# Altium PCB iot-gateway.PcbDoc
Units mil, origin at the board's own origin, x right, y up, seen from the top; angles counter-clockwise.
Board outline 6000 x 4000 mil, 2 copper layers (Top Layer, Bottom Layer); 110 components, 103 nets, 392 pads, 16 vias.
Unrouted connection lines stored in the file: 217.
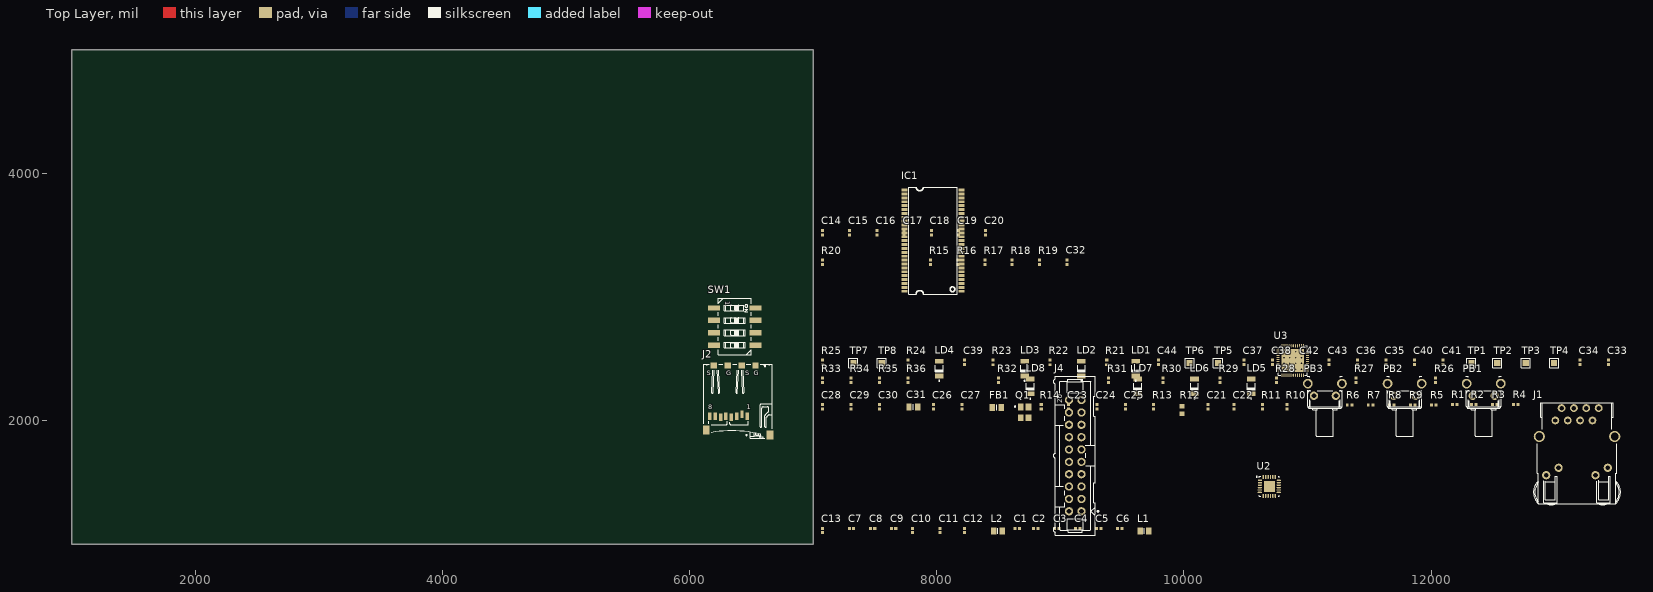
[diagram p0: Top Layer view]
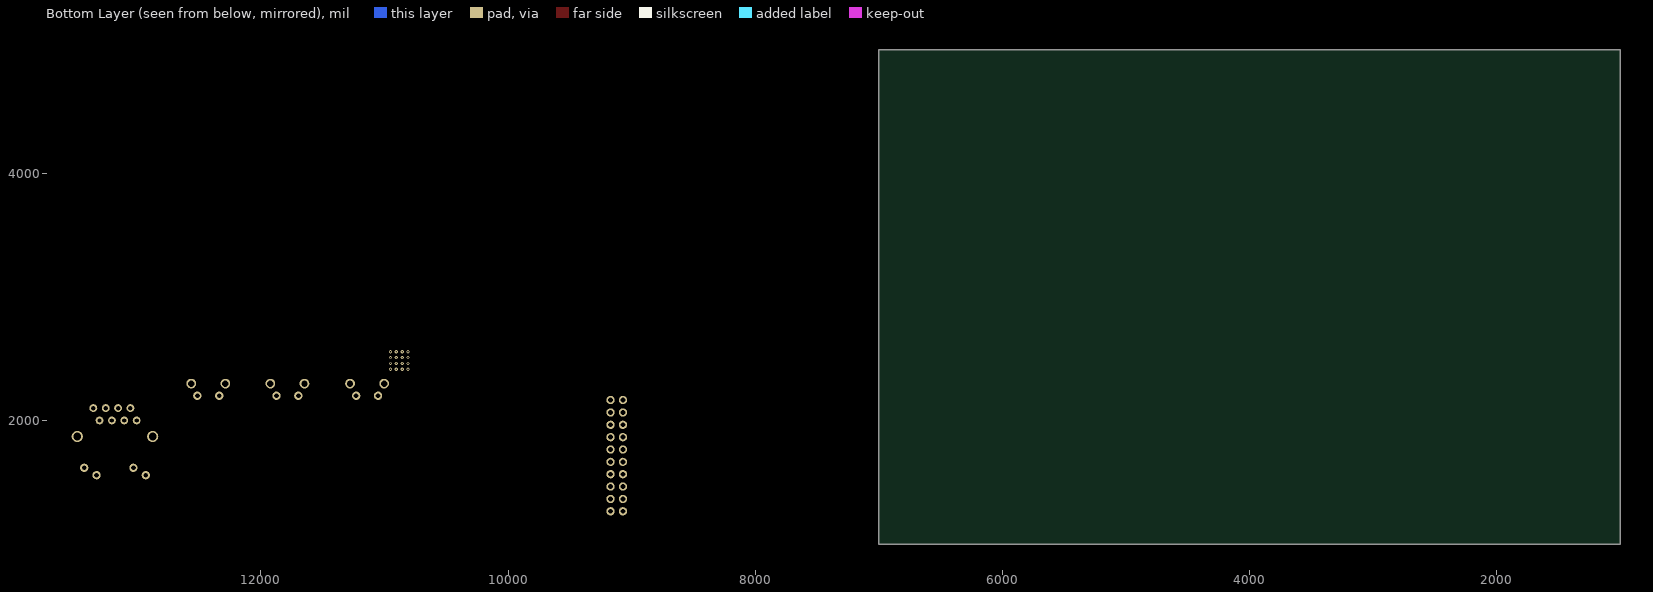
[diagram p1: Bottom Layer view, seen from below]

## Layer stack, top to bottom
Top Solder: solder mask 0.4, Solder Resist, Dk 3.5
Top Layer: signal copper 1.4
Dielectric 1: dielectric 12.6, FR-4, Dk 4.8
Bottom Layer: signal copper 1.4
Bottom Solder: solder mask 0.4, Solder Resist, Dk 3.5

## Board outline
1000,1000 7000,1000 7000,5000 1000,5000

## Design rules (kind name [scope] priority, off if disabled: settings)
Clearance [All] p1: gap=10 ignorepadtopadclearanceinfootprint=FALSE except(0: Arc-Hole Track-Hole SMDPad-Hole THPad-Hole Via-Hole Fill-Hole Poly-Hole Region-Hole Text-Hole)
DiffPairsRouting [All] p1: maxlimit=10 minlimit=10 mostfreqgap=10 toplayer_minwidth=15 toplayer_maxwidth=15 toplayer_prefwidth=15 bottomlayer_minwidth=15 bottomlayer_maxwidth=15 bottomlayer_prefwidth=15 maxuncoupledlength=500
PolygonConnect [All] p1: connectstyle=Relief reliefconductorwidth=10 reliefentries=4 polygonreliefangle="90 Angle" airgapwidth=10
RoomDefinition SDRAM [InComponentClass('SDRAM')] p1: confinementstyle=ConfineIn formatcopy=TRUE lockcomponents=FALSE outline 7045,3475 8560,3475 8560,3665 7045,3665
RoomDefinition PERIPH [InComponentClass('PERIPH')] p2: confinementstyle=ConfineIn formatcopy=TRUE lockcomponents=FALSE outline 7045,2670 9220,2670 9220,3425 7045,3425
RoomDefinition ISM [InComponentClass('ISM')] p3: confinementstyle=ConfineIn formatcopy=TRUE lockcomponents=FALSE outline 7045,2305 13600,2305 13600,2615 7045,2615
RoomDefinition ETHERNET [InComponentClass('ETHERNET')] p4: confinementstyle=ConfineIn formatcopy=TRUE lockcomponents=FALSE outline 7045,1305 13550,1305 13550,2255 7045,2255
RoomDefinition CPU [InComponentClass('CPU')] p5: confinementstyle=ConfineIn formatcopy=TRUE lockcomponents=FALSE outline 7045,1055 9755,1055 9755,1255 7045,1255
RoutingVias [All] p1: holewidth=28 width=50 viastyle="Through Hole" minholewidth=28 minwidth=50 maxholewidth=28 maxwidth=50
SolderMaskExpansion [All] p1: expansion=4
Width [All] p1: maxlimit=10 minlimit=10 preferedwidth=10
29 further rules are at their usual default settings.

## Classes and differential pairs
component class SDRAM: C14 C15 C16 C17 C18 C19 C20 IC1
component class CPU: C1 C2 C3 C4 C5 C6 C7 C8 C9 C10 C11 C12 C13 L1 L2 U1
component class ETHERNET: C21 C22 C23 C24 C25 C26 C27 C28 C29 C30 C31 FB1 J1 Q1 R1 R2 R3 R4 R5 R6 R7 R8 R9 R10 R11 R12 R13 R14 U2
component class ISM: C33 C34 C35 C36 C37 C38 C39 C40 C41 C42 C43 C44 C45 J3 L3 L4 L5 LD1 LD2 LD3 LD4 P1 R21 R22 R23 R24 R25 TP1 TP2 TP3 TP4 TP5 TP6 TP7 TP8 U3 X1 X2
component class PERIPH: C32 J2 J4 LD5 LD6 LD7 LD8 PB1 PB2 PB3 R15 R16 R17 R18 R19 R20 R26 R27 R28 R29 R30 R31 R32 R33 R34 R35 R36 SW1
differential pair RD: +RD_P -RD_N
differential pair TD: +TD_P -TD_N

## Components (designator, comment, footprint, x,y, rotation, side; value= is the part's Value field where it differs from the comment)
C1 "100nF" CAPC1005X55N 8650,1125 r0 top
C2 "100nF" CAPC1005X55N 8800,1125 r0 top
C3 "100nF" CAPC1005X55N 8970,1125 r0 top
C4 "100nF" CAPC1005X55N 9140,1125 r0 top
C5 "100nF" CAPC1005X55N 9310,1125 r0 top
C6 "100nF" CAPC1005X55N 9480,1125 r0 top
C7 "100nF" CAPC1005X55N 7310,1125 r0 top
C8 "100nF" CAPC1005X55N 7480,1125 r0 top
C9 "100nF" CAPC1005X55N 7650,1125 r0 top
C10 "100nF" CAPC1005X55N 7805,1110 r90 top
C11 "100nF" CAPC1005X55N 8025,1110 r90 top
C12 "100nF" CAPC1005X55N 8225,1110 r90 top
C13 "100nF" CAPC1005X55N 7075,1110 r90 top
C14 "100nF" CAPC1005X55N 7075,3520 r90 top
C15 "100nF" CAPC1005X55N 7295,3520 r90 top
C16 "100nF" CAPC1005X55N 7515,3520 r90 top
C17 "100nF" CAPC1005X55N 7735,3520 r90 top
C18 "100nF" CAPC1005X55N 7955,3520 r90 top
C19 "100nF" CAPC1005X55N 8175,3520 r90 top
C20 "100nF" CAPC1005X55N 8395,3520 r90 top
C21 "100nF" CAPC1005X55N 10195,2110 r90 top
C22 "100nF" CAPC1005X55N 10405,2110 r90 top
C23 "470pF" CAPC1005X55N 9065,2110 r90 top
C24 "1uF" CAPC1005X55N 9295,2110 r90 top
C25 "100nF" CAPC1005X55N 9525,2110 r90 top
C26 "18pF" CAPC1005X55N 7975,2110 r90 top
C27 "18pF" CAPC1005X55N 8205,2110 r90 top
C28 "100nF" CAPC1005X55N 7075,2110 r90 top
C29 "100nF" CAPC1005X55N 7305,2110 r90 top
C30 "100nF" CAPC1005X55N 7535,2110 r90 top
C31 "10uF" CAPC2012X135N 7810,2110 r0 top
C32 "100nF" CAPC1005X55N 9055,3280 r90 top
C33 "1uF" CAPC1005X55N 13435,2470 r90 top
C34 "4.7uF" CAPC1005X55N 13205,2470 r90 top
C35 "100nF" CAPC1005X55N 11635,2470 r90 top
C36 "100nF" CAPC1005X55N 11405,2470 r90 top
C37 "12pF" CAPC1005X55N 10485,2470 r90 top
C38 "12pF" CAPC1005X55N 10715,2470 r90 top
C39 "100nF" CAPC1005X55N 8225,2470 r90 top
C40 "12pF" CAPC1005X55N 11865,2470 r90 top
C41 "12pF" CAPC1005X55N 12095,2470 r90 top
C42 "100pF" CAPC1005X55N 10945,2470 r90 top
C43 "Undefined" CAPC1005X55N 11175,2470 r90 top
C44 "Undefined" CAPC1005X55N 9795,2470 r90 top
FB1 "220R@100MHz" INDC2012X105N 8485,2105 r0 top
IC1 "IS42S16" TSOP-54 7970,3455 r90 top
J1 "RJ45" TYCO_5-6605308-1 13180,2050 r0 top
J2 "microSD" ATTEND_112A-TAAR-R03 6315.04,2035 r0 top
J4 "Header 20" 3M_N2520-6002RB 9120,1715 r90 top
L1 "220R@100MHz" INDC2012X105N 9680,1105 r0 top
L2 "220R@100MHz" INDC2012X105N 8495,1105 r0 top
LD1 "Green" LED_OSRAM_LGN971 9610,2420 r90 top
LD2 "Green" LED_OSRAM_LGN971 9170,2420 r90 top
LD3 "Green" LED_OSRAM_LGN971 8710,2420 r90 top
LD4 "Green" LED_OSRAM_LGN971 8020,2420 r90 top
LD5 "Green" LED_OSRAM_LGN971 10545,2275 r90 top
LD6 "Green" LED_OSRAM_LGN971 10085,2275 r90 top
LD7 "Green" LED_OSRAM_LGN971 9625,2275 r90 top
LD8 "Green" LED_OSRAM_LGN971 8755,2275 r90 top
PB1 "Push Button" PB_TYCO_1-1825027-1 12425,2200 r90 top
PB2 "Push Button" PB_TYCO_1-1825027-1 11785,2200 r90 top
PB3 "Push Button" PB_TYCO_1-1825027-1 11140,2200 r90 top
Q1 "25MHz" XTAL_EPSON_TSX-3225 8710,2065 r0 top
R1 "49R9" RESC1005X35N 12190,2130 r0 top
R2 "49R9" RESC1005X35N 12345,2130 r0 top
R3 "49R9" RESC1005X35N 12515,2130 r0 top
R4 "49R9" RESC1005X35N 12685,2130 r0 top
R5 "1k5" RESC1005X40N 12020,2125 r0 top
R6 "4k7" RESC1005X40N 11340,2125 r0 top
R7 "4k7" RESC1005X40N 11510,2125 r0 top
R8 "4k7" RESC1005X40N 11680,2125 r0 top
R9 "4k7" RESC1005X40N 11850,2125 r0 top
R10 "33" RESC1005X40N 10835,2110 r90 top
R11 "33" RESC1005X40N 10635,2110 r90 top
R12 "21k" RESC1608X55N 9985,2085 r90 top
R13 "33" RESC1005X40N 9755,2110 r90 top
R14 "4k7" RESC1005X40N 8845,2110 r90 top
R15 "10k" RESC1005X40N 7950,3280 r90 top
R16 "10k" RESC1005X40N 8170,3280 r90 top
R17 "10k" RESC1005X40N 8390,3280 r90 top
R18 "10k" RESC1005X40N 8610,3280 r90 top
R19 "10k" RESC1005X40N 8830,3280 r90 top
R20 "10k" RESC1005X40N 7075,3280 r90 top
R21 "10k" RESC1005X40N 9375,2470 r90 top
R22 "10k" RESC1005X40N 8915,2470 r90 top
R23 "10k" RESC1005X40N 8455,2470 r90 top
R24 "10k" RESC1005X40N 7765,2470 r90 top
R25 "0" RESC1005X40N 7075,2470 r90 top
R26 "10k" RESC1005X40N 12035,2325 r90 top
R27 "10k" RESC1005X40N 11390,2325 r90 top
R28 "10k" RESC1005X40N 10750,2325 r90 top
R29 "10k" RESC1005X40N 10290,2325 r90 top
R30 "10k" RESC1005X40N 9830,2325 r90 top
R31 "10k" RESC1005X40N 9390,2325 r90 top
R32 "10k" RESC1005X40N 8500,2325 r90 top
R33 "10k" RESC1005X40N 7075,2325 r90 top
R34 "10k" RESC1005X40N 7305,2325 r90 top
R35 "10k" RESC1005X40N 7535,2325 r90 top
R36 "10k" RESC1005X40N 7765,2325 r90 top
SW1 "Switch" SW_CTS_219-4MST 6365,2760 r0 top
TP1 "Test Point" TPS127 12325,2465 r0 top
TP2 "Test Point" TPS127 12535,2465 r0 top
TP3 "Test Point" TPS127 12765,2465 r0 top
TP4 "Test Point" TPS127 12995,2465 r0 top
TP5 "Test Point" TPS127 10275,2465 r0 top
TP6 "Test Point" TPS127 10045,2465 r0 top
TP7 "Test Point" TPS127 7325,2465 r0 top
TP8 "Test Point" TPS127 7555,2465 r0 top
U2 "LAN8742A-CZ-TR" QFN50P400X400X80-25N-S225 10690.16,1466.77 r0 top
U3 "nRF52832-QFAA" QFN40P600X600X90-48N 10880,2485 r0 top

## Footprints (in the part's own frame and the unit in brackets; to place one, negate y for a bottom-side part, rotate by r counter-clockwise, add the part's x,y. Pads: shape width x height; smd on the part's side, far side on the other; paste and mask are expansions set on the pad)
3M_N2520-6002RB [mm] "20 Contacts - Straight .100\" x .100\" Low Profile Four-Wall Header"
  round 1.7 hole 1: 1(-11.43,-1.27) 2(-11.43,1.27) 3(-8.89,-1.27) 4(-8.89,1.27) 5(-6.35,-1.27) 6(-6.35,1.27) 7(-3.81,-1.27) 8(-3.81,1.27) 9(-1.27,-1.27) 10(-1.27,1.27) 11(1.27,-1.27) 12(1.27,1.27) 13(3.81,-1.27) 14(3.81,1.27) 15(6.35,-1.27) 16(6.35,1.27) 17(8.89,-1.27) 18(8.89,1.27) 19(11.43,-1.27) 20(11.43,1.27)
  silkscreen extent -16.36,-4.85 16.36,4.52, body extent -16.36,-4.11 16.36,4.52, height 9.91
ATTEND_112A-TAAR-R03 [mm] "MicroSD Socket, Push-Push Type"
  rect 0.7x1.5 smd: 1(3.85,0) 2(2.75,0.4) 3(1.65,0) 4(0.55,-0.2) 5(-0.55,0) 6(-1.65,-0.2) 7(-2.75,0) 8(-3.85,0)
  rect 1.4x1.9 smd: 9(-4.6,-2.85) 9(8.53,-3.85)
  rect 1.3x1.2 smd: 9(-0.17,10.4) 9(5.53,10.4) 10(-3.02,10.4) 10(2.68,10.4)
  silkscreen extent -5.07,-4.5 8.93,10.7, body extent -5.07,-4.5 8.94,10.7, height 1.83
CAPC1005X55N [mm] "Chip Capacitor, Body 1.0x0.55mm, IPC Medium Density"
  rect 0.62x0.62 smd: 1(-0.45,0) 2(0.45,0)
  body extent -0.52,-0.27 0.53,0.28, height 0.55
CAPC2012X135N [mm] "Chip Capacitor, Body 2.0x1.25mm, IPC Medium Density"
  rect 1.05x1.4 smd: 1(-0.9,0) 2(0.9,0)
  silkscreen extent 0,-0.58 0,0.58, body extent -1.05,-0.67 1.05,0.68, height 1.25
INDC2012X105N [mm] "Chip Inductor, EIA 0805, Metric 2012, Body 2.0x1.25mm, IPC Medium Density"
  rect 1.15x1.45 smd: 1(-0.9,0) 2(0.9,0)
  silkscreen extent 0,-0.6 0,0.6, body extent -1.1,-0.7 1.1,0.7, height 1.1
LED_OSRAM_LGN971 [mm] "Green Chip LED, 2-Leads, Body 3.2 x1.6mm, IPC Medium Density"
  rect 1x1.75 smd: 1(-1.5,0) 2(1.5,0)
  silkscreen extent -2.62,-0.8 0.65,0.8, body extent -1.65,-0.85 1.65,0.85, height 1.2
PB_TYCO_1-1825027-1 [mm] "Right Angle Micro Miniature Tactile Pushbutton Switche, Round Actuator Length = 5.74mm, FSMRAJ Serie"
  round 1.7 hole 1: 1(0,-2.25) 2(0,2.25)
  round 2 hole 1.3: 3(2.49,-3.505) 4(2.49,3.505)
  silkscreen extent -8.36,-3.56 4,3.56, body extent -8.36,-4.2 4,4.2, height 7.01
QFN40P600X600X90-48N [mm]
  oval 0.65x0.2 smd: 1(-3.025,2.2) 2(-3.025,1.8) 3(-3.025,1.4) 4(-3.025,1) 5(-3.025,0.6) 6(-3.025,0.2) 7(-3.025,-0.2) 8(-3.025,-0.6) 9(-3.025,-1) 10(-3.025,-1.4) 11(-3.025,-1.8) 12(-3.025,-2.2) 25(3.025,-2.2) 26(3.025,-1.8) 27(3.025,-1.4) 28(3.025,-1) 29(3.025,-0.6) 30(3.025,-0.2) 31(3.025,0.2) 32(3.025,0.6) 33(3.025,1) 34(3.025,1.4) 35(3.025,1.8) 36(3.025,2.2)
  oval 0.2x0.65 smd: 13(-2.2,-3.025) 14(-1.8,-3.025) 15(-1.4,-3.025) 16(-1,-3.025) 17(-0.6,-3.025) 18(-0.2,-3.025) 19(0.2,-3.025) 20(0.6,-3.025) 21(1,-3.025) 22(1.4,-3.025) 23(1.8,-3.025) 24(2.2,-3.025) 37(2.2,3.025) 38(1.8,3.025) 39(1.4,3.025) 40(1,3.025) 41(0.6,3.025) 42(0.2,3.025) 43(-0.2,3.025) 44(-0.6,3.025) 45(-1,3.025) 46(-1.4,3.025) 47(-1.8,3.025) 48(-2.2,3.025)
  rect 4.7x4.7 smd: 49(0,0)
  silkscreen extent -4.02,-3 3,3, body extent -3.02,-3.02 3.02,3.02, height 0.86
QFN50P400X400X80-25N-S225 [mm] "QFN,0.50mm pitch,square;6 pin X 6 pin,4mm X 4mm body (w/thermal tab 2.25 X 2.25 mm), IPC Medium Density"
  oval 0.85x0.3 smd: 1(-1.95,1.25) 2(-1.95,0.75) 3(-1.95,0.25) 4(-1.95,-0.25) 5(-1.95,-0.75) 6(-1.95,-1.25) 13(1.95,-1.25) 14(1.95,-0.75) 15(1.95,-0.25) 16(1.95,0.25) 17(1.95,0.75) 18(1.95,1.25)
  oval 0.3x0.85 smd: 7(-1.25,-1.95) 8(-0.75,-1.95) 9(-0.25,-1.95) 10(0.25,-1.95) 11(0.75,-1.95) 12(1.25,-1.95) 19(1.25,1.95) 20(0.75,1.95) 21(0.25,1.95) 22(-0.25,1.95) 23(-0.75,1.95) 24(-1.25,1.95)
  rect 2.25x2.25 smd: 25(0,0)
  silkscreen extent -2.72,-2.05 2.05,2.07, body extent -2.07,-2.07 2.08,2.08, height 0.8
RESC1005X35N [mm] "Chip Resistor, EIA 0402, Metric 1005, Body 1.0x0.5mm, IPC Medium Density"
  rect 0.58x0.62 smd: 1(-0.47,0) 2(0.47,0)
  body extent -0.52,-0.27 0.53,0.28, height 0.35
RESC1005X40N [mm] "Chip Resistor, EIA 0402, Metric 1005, Body 1.0x0.5mm, IPC Medium Density"
  rect 0.58x0.62 smd: 1(-0.47,0) 2(0.47,0)
  body extent -0.52,-0.27 0.53,0.28, height 0.4
RESC1608X55N [mm] "Chip Resistor, EIA 0603, Metric 1608, Body 1.6x0.8mm, IPC Medium Density"
  rect 0.9x1 smd: 1(-0.8,0) 2(0.8,0)
  body extent -0.87,-0.47 0.88,0.48, height 0.55
SW_CTS_219-4MST [mm] "Pitch 2.54mm, Body 6.7 x 11.63mm, 4 Ways SPST Surface-Mounting DIP Switch, CTS 219 Series"
  rect 2.44x1.13 smd: 1(-4.3,3.81) 2(-4.3,1.27) 3(-4.3,-1.27) 4(-4.3,-3.81) 5(4.3,-3.81) 6(4.3,-1.27) 7(4.3,1.27) 8(4.3,3.81)
  silkscreen extent -3.35,-5.82 3.35,5.82, body extent -4.95,-5.81 4.96,5.82, height 4.3
TPS127 [mil] "1.27 x  1.27mm SMD Test Point Area"
  rect 50x50 smd paste-50: 1(0,0)
  silkscreen extent -37,-37 37,37
TSOP-54 [mm]
  rect 0.6x1.2 smd: 1(-10.4,-5.85) 2(-9.6,-5.85) 3(-8.8,-5.85) 4(-8,-5.85) 5(-7.2,-5.85) 6(-6.4,-5.85) 7(-5.6,-5.85) 8(-4.8,-5.85) 9(-4,-5.85) 10(-3.2,-5.85) 11(-2.4,-5.85) 12(-1.6,-5.85) 13(-0.8,-5.85) 14(0,-5.85) 15(0.8,-5.85) 16(1.6,-5.85) 17(2.4,-5.85) 18(3.2,-5.85) 19(4,-5.85) 20(4.8,-5.85) 21(5.6,-5.85) 22(6.4,-5.85) 23(7.2,-5.85) 24(8,-5.85) 25(8.8,-5.85) 26(9.6,-5.85) 27(10.4,-5.85) 28(10.4,5.85) 29(9.6,5.85) 30(8.8,5.85) 31(8,5.85) 32(7.2,5.85) 33(6.4,5.85) 34(5.6,5.85) 35(4.8,5.85) 36(4,5.85) 37(3.2,5.85) 38(2.4,5.85) 39(1.6,5.85) 40(0.8,5.85) 41(0,5.85) 42(-0.8,5.85) 43(-1.6,5.85) 44(-2.4,5.85) 45(-3.2,5.85) 46(-4,5.85) 47(-4.8,5.85) 48(-5.6,5.85) 49(-6.4,5.85) 50(-7.2,5.85) 51(-8,5.85) 52(-8.8,5.85) 53(-9.6,5.85) 54(-10.4,5.85)
  silkscreen extent -11,-5 11,5
TYCO_5-6605308-1 [mm] "1 Port, Yellow/Green LEDs, RJ45 10/100Base-T Ethernet, Mag45 Connector Module With Integrated Magnetics"
  round 1.6 hole 0.9: 1(-4.445,-1.27) 2(-3.175,1.27) 3(-1.905,-1.27) 4(-0.635,1.27) 5(0.635,-1.27) 6(1.905,1.27) 7(3.175,-1.27) 8(4.445,1.27)
  round 2.3 hole 1.6: 9(-7.747,-4.572) 10(7.747,-4.572)
  round 1.7 hole 1: D1(-6.325,-12.522) D2(-3.785,-10.998) D3(6.325,-10.998) D4(3.785,-12.522)
  round 1 hole 3.2 unplated mask+1.1: M1(-5.715,-7.62) M2(5.715,-7.62)
  silkscreen extent -8.95,-18.59 8.95,2.41, body extent -8.95,-18.6 8.95,2.41, height 14.97
XTAL_EPSON_TSX-3225 [mm] "Crystal TSX-3225 Serie, Corner Concave; 4 pin, 2.50mm L X 3.2mm W X 0.6mm H"
  rect 1.15x1.4 smd: 1(-0.8,1.1) 2(-0.8,-1.1) 3(0.8,-1.1) 4(0.8,1.1)
  silkscreen extent -2.07,1.08 -1.83,1.32, body extent -1.25,-1.6 1.25,1.6, height 0.6

## Part data
C1 C2 C3 C4 C5 C6 C7 C8 C9 C10 C11 C12 C13 C14 C15 C16 C17 C18 C19 C20 C21 C22 C25 C28 C29 C30 C32 C35 C36 C39: library part CC0402_100NF_16V_10%_X5R, "Non-polarised capacitor", Case=0402, Manufacturer=GENERIC, Manufacturer1 ComponentHeight=0.55mm, Manufacturer1 Example=MURATA, Manufacturer1 Part Number=GRM155R61C104KA88D, Tolerance=±10%, Voltage=16V, Author="CERN DEM JLC", Component Type=Standard, CreateDate=2013-12-10, HelpURL=\\cern.ch\dfs\Applications\Altium\Datasheets\CC0402_X5R_MURATA_GRM.pdf, LatestRevisionDate=2013-12-10, Manufacturer Part Number=CC0402_100NF_16V_10%_X5R, Mounted=Yes, Part Description="SMD Multilayer Chip Ceramic Capacitor", Part Number=CC0402_100NF_16V_10%_X5R, Pin Count=2, Sense=No, SMD=Yes, Socket=No, Status=None, TC=X5R
C23: library part CC0402_470PF_50V_10%_X7R, "Non-polarised capacitor", Case=0402, Manufacturer=GENERIC, Manufacturer1 ComponentHeight=0.55mm, Manufacturer1 Example=PHYCOMP, Manufacturer1 Part Number=223858715618, Tolerance=±10%, Voltage=50V, Author="CERN DEM JLC", Component Type=Standard, CreateDate=2007-12-03, HelpURL=\\cern.ch\dfs\Applications\Altium\Datasheets\CC0402_NP0_PHYCOMP.pdf, LatestRevisionDate=2007-12-03, Manufacturer Part Number=CC0402_470PF_50V_10%_X7R, Mounted=Yes, Part Description="SMD Multilayer Chip Ceramic Capacitor", Part Number=CC0402_470PF_50V_10%_X7R, Pin Count=2, Sense=No, SMD=Yes, Socket=No, Status="Not Recommended", TC=X7R
C24 C33: library part CC0402_1UF_16V_10%_X5R, "Non-polarised capacitor", Case=0402, Manufacturer=GENERIC, Manufacturer1 ComponentHeight=0.55mm, Manufacturer1 Example=TDK, Manufacturer1 Part Number=C1005X5R1C105KT, Tolerance=±10%, Voltage=16V, Author="CERN DEM JLC", Component Type=Standard, CreateDate=2012-10-25, HelpURL=\\cern.ch\dfs\Applications\Altium\Datasheets\CC0402_X5R_TDK_C.pdf, LatestRevisionDate=2012-10-25, Manufacturer Part Number=CC0402_1UF_16V_10%_X5R, Mounted=Yes, Part Description="SMD Multilayer Chip Ceramic Capacitor", Part Number=CC0402_1UF_16V_10%_X5R, Pin Count=2, Sense=No, SMD=Yes, Socket=No, Status=Preferred, TC=X5R
C26 C27: library part CC0402_18PF_50V_5%_C0G, "Non-polarised capacitor", Case=0402, Manufacturer=GENERIC, Manufacturer1 ComponentHeight=0.55mm, Manufacturer1 Example=KEMET, Manufacturer1 Part Number=C0402C180J5GACTU, Tolerance=±5%, Voltage=50V, Author="CERN DEM JLC", Component Type=Standard, CreateDate=2016-10-04, HelpURL="\\cern.ch\dfs\Applications\Altium\Datasheets\CC0805_C0G_KEMET_(Commercial Grade).pdf", LatestRevisionDate=2016-10-04, Manufacturer Part Number=CC0402_18PF_50V_5%_C0G, Mounted=Yes, Part Description="SMD Multilayer Chip Ceramic Capacitor", Part Number=CC0402_18PF_50V_5%_C0G, Pin Count=2, Sense=No, SMD=Yes, Socket=No, Status=Preferred, TC=C0G/NP0
C31: library part CC0805_10UF_16V_10%_X5R, "Non-polarised capacitor", Case=0805, Manufacturer=GENERIC, Manufacturer1 ComponentHeight=1.4mm, Manufacturer1 Example=KEMET, Manufacturer1 Part Number=C0805C106K4PAC, Tolerance=±10%, Voltage=16V, Author="CERN DEM JLC", Component Type=Standard, CreateDate=2007-12-03, HelpURL=\\cern.ch\dfs\Applications\Altium\Datasheets\CC1206_X5R_KEMET.pdf, LatestRevisionDate=2007-12-03, Manufacturer Part Number=CC0805_10UF_16V_10%_X5R, Mounted=Yes, Part Description="SMD Multilayer Chip Ceramic Capacitor", Part Number=CC0805_10UF_16V_10%_X5R, Pin Count=2, Sense=No, SMD=Yes, Socket=No, Status=Preferred, TC=X5R
C34: library part CC0402_4.7UF_6.3V_20%_X5R, "Non-polarised capacitor", Case=0402, Manufacturer=GENERIC, Manufacturer1 ComponentHeight=0.65mm, Manufacturer1 Example=TDK, Manufacturer1 Part Number=C1005X5R0J475M050BC, Tolerance=±20%, Voltage=6.3V, Author="CERN DEM JLC", Component Type=Standard, CreateDate=2015-03-03, HelpURL=\\cern.ch\dfs\Applications\Altium\Datasheets\CC0402_X5R_TDK_C.pdf, LatestRevisionDate=2015-03-03, Manufacturer Part Number=CC0402_4.7UF_6.3V_20%_X5R, Mounted=Yes, Part Description="SMD Multilayer Chip Ceramic Capacitor", Part Number=CC0402_4.7UF_6.3V_20%_X5R, Pin Count=2, Sense=No, SMD=Yes, Socket=No, Status=Preferred, TC=X5R
C37 C38 C40 C41: library part CC0402_12PF_50V_5%_C0G, "Non-polarised capacitor", Case=0402, Manufacturer=GENERIC, Manufacturer1 ComponentHeight=0.55mm, Manufacturer1 Example=KEMET, Manufacturer1 Part Number=C0402C120J5GACTU, Tolerance=±5%, Voltage=50V, Author="CERN DEM JLC", Component Type=Standard, CreateDate=2016-10-04, HelpURL="\\cern.ch\dfs\Applications\Altium\Datasheets\CC0805_C0G_KEMET_(Commercial Grade).pdf", LatestRevisionDate=2016-10-04, Manufacturer Part Number=CC0402_12PF_50V_5%_C0G, Mounted=Yes, Part Description="SMD Multilayer Chip Ceramic Capacitor", Part Number=CC0402_12PF_50V_5%_C0G, Pin Count=2, Sense=No, SMD=Yes, Socket=No, Status=Preferred, TC=C0G/NP0
C42: library part CC0402_100PF_50V_5%_C0G, "Non-polarised capacitor", Case=0402, Manufacturer=GENERIC, Manufacturer1 ComponentHeight=0.55mm, Manufacturer1 Example=KEMET, Manufacturer1 Part Number=C0402C101J5GACTU, Tolerance=±5%, Voltage=50V, Author="CERN DEM JLC", Component Type=Standard, CreateDate=2007-12-03, HelpURL="\\cern.ch\dfs\Applications\Altium\Datasheets\CC0805_C0G_KEMET_(Commercial Grade).pdf", LatestRevisionDate=2015-04-22, Manufacturer Part Number=CC0402_100PF_50V_5%_C0G, Mounted=Yes, Part Description="SMD Multilayer Chip Ceramic Capacitor", Part Number=CC0402_100PF_50V_5%_C0G, Pin Count=2, Sense=No, SMD=Yes, Socket=No, Status=Preferred, TC=C0G/NP0
C43 C44: library part CC0402_NO-VALUE, "Non-polarised capacitor", Case=0402, Manufacturer1 ComponentHeight=0.55mm, Author="CERN DEM JLC", Component Type=Standard, CreateDate=2014-01-14, HelpURL=Undefined, LatestRevisionDate=2014-01-14, Manufacturer=Undefined, Manufacturer Part Number=CC0402_NO-VALUE, Mounted=No, Part Description="Reserved Footprint For 0402(1005) Chip Ceramic Capacitor", Part Number=CC0402_NO-VALUE, Pin Count=2, Sense=No, SMD=Yes, Socket=No, Status=None
FB1 L1 L2: library part IND0805_MURATA_BLM21PG221SN1D, "Inductor", Case=0805, Manufacturer=MURATA, Manufacturer Part Number=BLM21PG221SN1D, Power=2A, Resistance=0.05R, Tolerance=±25%, Author="CERN DEM JLC", ComponentHeight=1.05mm, Component Type=Standard, CreateDate=2010-01-25, HelpURL=\\cern.ch\dfs\Applications\Altium\Datasheets\IND0402_MURATA_BLM21P.pdf, LatestRevisionDate=2010-01-25, Mounted=Yes, Part Description="SMD EMIFIL Suppression Chip Ferrite Bead", Part Number=IND0805_MURATA_BLM21PG221SN1D, Pin Count=2, SMD=Yes, Socket=No, Status=None
  FB1: Table="Inductors SMD"
  L1 L2: Sense=No
IC1: "SDRAM 64m 200mhz 54tsop", Package="TSOP-54 ISSI", Availability=Unavailable, MF=ISSI, MP=IS42S16400J-5TL-TR, Price="1.24 USD"
J1: library part TYCO_5-6605308-1, "1 Port, Yellow/Green LEDs, RJ45 10/100Base-T Ethernet, Mag45 Connector Module With Integrated Magnetics", Manufacturer="TYCO ELECTRONICS", Manufacturer Part Number=5-6605308-1, Author="CERN DEM JLC", ComponentHeight=15.24mm, Component Type=Standard, CreateDate=2012-08-23, Family=RJ45, HelpURL=\\cern.ch\dfs\Applications\Altium\Datasheets\TYCO_5-6605308-1.pdf, LatestRevisionDate=2012-08-23, Mounted=Yes, Part Description="1 Port, Yellow/Green LEDs, RJ45 10/100Base-T Ethernet, Mag45 Connector Module With Integrated Magnetics", Part Number=TYCO_5-6605308-1, Pin Count=14, PressFit=No, Sense=No, SMD=No, Socket=No, Status=None
J2: library part ATTEND_112A-TAAR-R03, "Connector MicroSD 8 Pin + Switch", Manufacturer=ATTEND, Manufacturer Part Number=112A-TAAR-R03, Author="CERN DEM JMW", ComponentHeight=1.9mm, Component Type=Standard, CreateDate=2015-07-07, Family=microSD, HelpURL=\\cern.ch\dfs\Applications\Altium\Datasheets\ATTEND_112A-TAAR-R03.pdf, LatestRevisionDate=2015-07-07, Mounted=Yes, Part Description="MicroSD Socket, Push-Push Type", Part Number=ATTEND_112A-TAAR-R03, Pin Count=10, PressFit=No, Sense=No, SMD=Yes, Socket=No, Status=None
J4: library part 3M_N2520-6002RB, "Connector 20 Male", Manufacturer=3M, Manufacturer Part Number=N2520-6002RB, Author="CERN DEM JLC", ComponentHeight=10.03mm, Component Type=Standard, CreateDate=11.02.2009, Family="Header 20", HelpURL=\\cern.ch\dfs\Applications\Altium\Datasheets\3M_N2520-6002RB.pdf, LatestRevisionDate=11.08.2009, Mounted=Yes, Part Description="20 Contacts - Straight .100'' x .100'' Low Profile Four-Wall Header, 2500 Series", Part Number=3M_N2520-6002RB, Pin Count=20, PressFit=No, Sense=No, SMD=No, Socket=No, Status=None
LD1 LD2 LD3 LD4 LD5 LD6 LD7 LD8: library part LED_OSRAM_LGN971, "LED Green 1C 2A", Case=1206, Manufacturer=OSRAM, Manufacturer Part Number=LGN971, Author="CERN DEM JLC", Bonding=No, Color=Green, ComponentHeight=1.2mm, Component Type=Standard, CreateDate=2009-09-15, HelpURL=\\cern.ch\dfs\Applications\Altium\Datasheets\LED_OSRAM_LGN971.pdf, LatestRevisionDate=2010-03-17, Mounted=Yes, PackageDescription="Green Chip LED, 2-Leads, Body 3.2 x1.6mm, IPC Medium Density", Part Description="Surface Mount Green LED (1206 Case)", Part Number=LED_OSRAM_LGN971, Pin Count=2, PressFit=No, Sense=No, SMD=Yes, Socket=No
PB1 PB2 PB3: library part PB_TYCO_1-1825027-1, "Push-Button Switch SPDT", Manufacturer="TYCO ELECTRONICS", Manufacturer Part Number=1-1825027-1, Author="CERN DEM JLC", ComponentHeight=7.01mm, Component Type=Standard, CreateDate=2013-04-17, Family="Push Button", HelpURL=\\cern.ch\dfs\Applications\Altium\Datasheets\PB_TYCO_1-1825027-1.pdf, LatestRevisionDate=2013-10-28, Mounted=Yes, PackageDescription="Right Angle Micro Miniature Tactile Pushbutton Switch, Round Actuator Length = 5.74mm, FSMRAJ Serie", Part Description="Right Angle Micro Miniature Tactile Pushbutton Switch, Round Actuator Length = 5.74mm, FSMRAJ Serie", Part Number=PB_TYCO_1-1825027-1, Pin Count=4, PressFit=No, Sense=No, SMD=No, Socket=No, Status=None
Q1: library part "XTAL_25MHZ_EPSON_TSX-3225 25.0000MF10Z-AC", "Crystal 4 pins 1=XTAL Control 2=GND3=XTAL 4=GND", Manufacturer=EPSON, Manufacturer Part Number="TSX-3225 25.0000MF10Z-AC", Author="CERN DEM JLC", Bonding=No, ComponentHeight=0.6mm, ComponentLink1Description="Ordering Informations", ComponentLink1URL=\\cern.ch\dfs\Applications\Altium\Datasheets\XTAL_EPSON_TSX-3225_Ordering-Informations.pdf, Component Type=Standard, CreateDate=2012-04-03, HelpURL=\\cern.ch\dfs\Applications\Altium\Datasheets\XTAL_EPSON_TSX-3225.pdf, LatestRevisionDate=2016-10-06, Mounted=Yes, PackageDescription="Crystal TSX-3225 Serie, Corner Concave; 4 pin, 2.50mm L X 3.2mm W X 0.6mm H", Part Description="Tolerance ±10 ppm,  Stability:± 10ppm, -20°C to 75°C, 9pF, Surface Mount Quartz Crystal, TX-3225 Series", Part Number="XTAL_25MHZ_EPSON_TSX-3225 25.0000MF10Z-AC", Pin Count=4, PressFit=No, Sense=No, SMD=Yes, Socket=No
R1 R2 R3 R4: library part R0402_49R9_0.1%_0.063W_25PPM, "Resistor - 0.1%", Case=0402, Manufacturer=GENERIC, Manufacturer1 ComponentHeight=0.35mm, Manufacturer1 Example="TE CONNECTIVITY", Manufacturer1 Part Number=CPF0402B49R9E1, Power=0.063W, Tolerance=±0.1%, Author="CERN DEM JMW", Component Type=Standard, CreateDate=2015-09-22, HelpURL=\\cern.ch\dfs\Applications\Altium\Datasheets\R0402_TYCO_CPF.pdf, LatestRevisionDate=2015-09-22, Manufacturer Part Number=R0402_49R9_0.1%_0.063W_25PPM, Mounted=Yes, Part Description="Thin Film Precision Resistor", Part Number=R0402_49R9_0.1%_0.063W_25PPM, Pin Count=2, Sense=No, SMD=Yes, Socket=No, Status="Not Recommended", TC=±25ppm/°C
R5: library part R0402_1K5_1%_0.0625W_100PPM, "Resistor - 1%", Case=0402, Manufacturer=GENERIC, Manufacturer1 ComponentHeight=0.4mm, Manufacturer1 Example="YAGEO PHYCOMP", Manufacturer1 Part Number=232270671502L, Power=0.0625W, Tolerance=±1%, Author="CERN DEM JLC", Component Type=Standard, CreateDate=2007-12-03, HelpURL=\\cern.ch\dfs\Applications\Altium\Datasheets\R0402_Phycomp_RC0402.pdf, LatestRevisionDate=2012-10-17, Manufacturer Part Number=R0402_1K5_1%_0.0625W_100PPM, Mounted=Yes, Part Description="General Purpose Thick Film Chip Resistor", Part Number=R0402_1K5_1%_0.0625W_100PPM, Pin Count=2, Sense=No, SMD=Yes, Socket=No, Status="Not recommended", TC=±100ppm/°C
R6 R7 R8 R9 R14: library part R0402_4K7_1%_0.0625W_100PPM, "Resistor - 1%", Case=0402, Manufacturer=GENERIC, Manufacturer1 ComponentHeight=0.4mm, Manufacturer1 Example="YAGEO PHYCOMP", Manufacturer1 Part Number=232270674702L, Power=0.0625W, Tolerance=±1%, Author="CERN DEM JLC", Component Type=Standard, CreateDate=2007-12-03, HelpURL=\\cern.ch\dfs\Applications\Altium\Datasheets\R0402_Phycomp_RC0402.pdf, LatestRevisionDate=2012-10-17, Manufacturer Part Number=R0402_4K7_1%_0.0625W_100PPM, Mounted=Yes, Part Description="General Purpose Thick Film Chip Resistor", Part Number=R0402_4K7_1%_0.0625W_100PPM, Pin Count=2, Sense=No, SMD=Yes, Socket=No, Status="Not recommended", TC=±100ppm/°C
R10 R11 R13: library part R0402_33R_1%_0.0625W_100PPM, "Resistor - 1%", Case=0402, Manufacturer=GENERIC, Manufacturer1 ComponentHeight=0.4mm, Manufacturer1 Example="YAGEO PHYCOMP", Manufacturer1 Part Number=232270673309L, Power=0.0625W, Tolerance=±1%, Author="CERN DEM JLC", Component Type=Standard, CreateDate=2007-12-03, HelpURL=\\cern.ch\dfs\Applications\Altium\Datasheets\R0402_Phycomp_RC0402.pdf, LatestRevisionDate=2012-10-17, Manufacturer Part Number=R0402_33R_1%_0.0625W_100PPM, Mounted=Yes, Part Description="General Purpose Thick Film Chip Resistor", Part Number=R0402_33R_1%_0.0625W_100PPM, Pin Count=2, Sense=No, SMD=Yes, Socket=No, Status="Not recommended", TC=±100ppm/°C
R12: library part R0603_21K_0.1%_0.063W_10PPM, "Resistor - 0.1%", Case=0603, Manufacturer=GENERIC, Manufacturer1 ComponentHeight=0.5mm, Manufacturer1 Example="TYCO HOLSWORTHY", Manufacturer1 Part Number=RN73C1J21KBTDF, Power=0.063W, Tolerance=±0.1%, Author="CERN DEM JLC", Component Type=Standard, CreateDate=2007-12-03, HelpURL=\\cern.ch\dfs\Applications\Altium\Datasheets\R0603_Tyco_RN73.pdf, LatestRevisionDate=2008-03-13, Manufacturer Part Number=R0603_21K_0.1%_0.063W_10PPM, Mounted=Yes, Part Description="Thin Film Chip Resistor", Part Number=R0603_21K_0.1%_0.063W_10PPM, Pin Count=2, Sense=No, SMD=Yes, Socket=No, Status="Not recommended", TC=±10ppm
R15 R16 R17 R18 R19 R20 R21 R22 R23 R24 R26 R27 R28 R29 R30 R31 R32 R33 R34 R35 R36: library part R0402_10K_1%_0.0625W_100PPM, "Resistor - 1%", Case=0402, Manufacturer=GENERIC, Manufacturer1 ComponentHeight=0.4mm, Manufacturer1 Example="YAGEO PHYCOMP", Manufacturer1 Part Number=232270671003L, Power=0.0625W, Tolerance=±1%, Author="CERN DEM JLC", Component Type=Standard, CreateDate=2007-12-03, HelpURL=\\cern.ch\dfs\Applications\Altium\Datasheets\R0402_Phycomp_RC0402.pdf, LatestRevisionDate=2012-10-17, Manufacturer Part Number=R0402_10K_1%_0.0625W_100PPM, Mounted=Yes, Part Description="General Purpose Thick Film Chip Resistor", Part Number=R0402_10K_1%_0.0625W_100PPM, Pin Count=2, Sense=No, SMD=Yes, Socket=No, Status="Not recommended", TC=±100ppm/°C
R25: library part R0402_0R_JUMPER, "Resistor", Case=0402, Manufacturer=GENERIC, Manufacturer1 ComponentHeight=0.4mm, Manufacturer1 Example="YAGEO PHYCOMP", Manufacturer1 Part Number=232270591001L, Author="CERN DEM JLC", Component Type=Standard, CreateDate=2007-12-03, HelpURL=\\cern.ch\dfs\Applications\Altium\Datasheets\R0402_Phycomp_RC0402.pdf, LatestRevisionDate=2012-10-17, Manufacturer Part Number=R0402_0R_JUMPER, Mounted=Yes, Part Description="1A (0.05R Max DC Resistance) Zero Ohm Jumper", Part Number=R0402_0R_JUMPER, Pin Count=2, Sense=No, SMD=Yes, Socket=No, Status="Not recommended"
SW1: library part SW_CTS_219-4MST, "4 Ways SPST DIP Switch", Manufacturer="CTS ELECTROCOMPONENTS", Manufacturer Part Number=219-4MST, Author="CERN DEM JLC", ComponentHeight=2.23mm, Component Type=Standard, CreateDate=2014-11-17, Family=Switch, HelpURL=\\cern.ch\dfs\Applications\Altium\Datasheets\SW_CTS_219-4MST.pdf, LatestRevisionDate=2014-11-17, Mounted=Yes, PackageDescription="Pitch 2.54mm, Body 6.7 x 11.63mm, 4 Ways SPST Surface-Mounting DIP Switch, CTS 219 Series", Part Description="4 Ways, Pitch 2.54mm, SPST DIP Switch, Rating 100mA 50VDC", Part Number=SW_CTS_219-4MST, Pin Count=8, PressFit=No, Sense=No, SMD=Yes, Socket=No, Status=None
TP1 TP2 TP3 TP4 TP5 TP6 TP7 TP8: library part SMD_PAD_1.27X1.27MM, Author="CERN DEM JLC", ComponentHeight=0mm, Component Type="Standard (No BOM)", CreateDate=2008-01-12, Family="Test Point", HelpURL=Undefined, LatestRevisionDate=2008-01-12, Mounted=No, PackageDescription="1.27mm x 1.27mm PCB Copper Area (SMD Test Point)", Part Description="1.27mm x 1.27mm PCB Copper Area (SMD Test Point)", Part Number=SMD_PAD_1.27X1.27MM, Pin Count=1, Sense=No, SMD=Yes, Socket=No, Status=None
U2: "LAN8742A-CZ-TR - Small Footprint RMII 10/100 Ethernet, Transceiver with HP Auto-MDIX and flexPWR Technology SQFN-24", Manuf_1=MICROCHIP, Distrib=MICROCHIP, Manuf_Part_1=LAN8742A-CZ-TR, Order=LAN8742A-CZ-TR
U3: "Multi-protocol Bluetooth Low Energy and 2.4GHz proprietary system-on-chip", Manufacturer="Nordic Semiconductor", Artikkelnr Noca=N.A., Artikkelnr Simpro=N.A., Footprint Doc=QFN-48, LatestRevisionDate=2014-11-26, Manufacturer Part Number=nRF52832-QFAA, Part Number=nRF52832-QFAA, Pin Count=48, Published=2014-11-26, Publisher="Nordic Semiconductor", Supplier="Nordic Semiconductor"

## Via types
v1: diameter 25.98, hole 12.99, Top Layer to Bottom Layer, 16 vias

## Nets (pads, with @x,y where several pads share a name; then routed paths per layer and width w, separated by ;. In a path a pad name is that pad's centre, name@x,y a point inside that pad or via, vN(x,y) a via of type N, cw(c..) or ccw(c..) an arc to the next point about the centre after c; other vN are vias at no path point)
ETH_LED1: J1.D3 U2.3
ETH_LED2: J1.D1 U2.2
GND: C1.1 C2.1 C3.1 C4.1 C5.1 C6.1 C7.1 C8.1 C9.1 C10.1 C11.1 C12.1 C13.1 C14.1 C15.1 C16.1 C17.1 C18.1 C19.1 C20.1 C21.1 C22.1 C23.1 C24.1 C25.1 C26.1 C27.1 C28.2 C29.1 C30.1 C31.1 C32.2 C33.1 C34.1 C35.2 C36.1 C37.1 C38.2 C39.1 C40.2 C41.2 C42.2 C43.2 C44.1 J1.9 J1.10 J1.D2 J1.D4 J2.6 J2.9 J4.1 J4.2 J4.19 J4.20 LD1.2 LD2.2 LD3.2 LD4.2 LD5.2 LD6.2 LD7.2 LD8.2 PB1.2 PB1.3 PB1.4 PB2.2 PB2.3 PB2.4 PB3.2 PB3.3 PB3.4 R12.2 R14.1 R33.1 R34.1 R35.1 R36.1 U2.25 U3.31 U3.45 U3.49
  other v1: 10809.13,2414.13 10856.38,2414.13 10903.62,2414.13 10950.87,2414.13 10809.13,2461.38 10856.38,2461.38 10903.62,2461.38 10950.87,2461.38 10809.13,2508.62 10856.38,2508.62 10903.62,2508.62 10950.87,2508.62 10809.13,2555.87 10856.38,2555.87 10903.62,2555.87 10950.87,2555.87
ISM_LED1: R21.2 U3.7
ISM_LED2: R22.2 U3.8
ISM_LED3: R23.2 U3.9
ISM_LED4: R24.2 U3.10
ISM_RST: R25.2 U3.24
NetC13_2: C13.2 L2.2
NetC23_2: C23.2 C24.2 U2.6
NetC26_2: C26.2 Q1.4
NetC27_2: C27.2 Q1.2
NetC33_2: C33.2 U3.46
NetC36_2: C36.2 U3.1
NetC37_2: C37.2 U3.2
NetC38_1: C38.1 U3.3
NetC40_1: C40.1 U3.35
NetC41_1: C41.1 U3.34
NetC42_1: C42.1 U3.33
NetC43_1: C43.1 U3.32
NetC44_2: C44.2
NetC45_2: U3.30
NetJ2_1: J2.1 R19.1
NetJ2_2: J2.2 R18.1
NetJ2_3: J2.3 R17.1
NetJ2_5: J2.5
NetJ2_7: J2.7 R16.1
NetJ2_8: J2.8 R15.1
NetJ2_10: J2.10 R20.1
NetJ4_3: J4.3
NetJ4_4: J4.4
NetJ4_5: J4.5
NetJ4_6: J4.6
NetJ4_7: J4.7
NetJ4_8: J4.8
NetJ4_9: J4.9
NetJ4_12: J4.12
NetJ4_13: J4.13
NetJ4_14: J4.14
NetJ4_15: J4.15
NetJ4_16: J4.16
NetJ4_17: J4.17
NetJ4_18: J4.18
NetL1_2: L1.2
NetL3_2: 
NetL4_2: U3.47
NetLD1_1: LD1.1 R21.1
NetLD2_1: LD2.1 R22.1
NetLD3_1: LD3.1 R23.1
NetLD4_1: LD4.1 R24.1
NetLD5_1: LD5.1 R29.1
NetLD6_1: LD6.1 R30.1
NetLD7_1: LD7.1 R31.1
NetLD8_1: LD8.1 R32.1
NetPB1_1: PB1.1 R26.1
NetPB2_1: PB2.1 R27.1
NetPB3_1: PB3.1 R28.1
NetQ1_1: Q1.1 U2.5
NetQ1_3: Q1.3 U2.4
NetR5_1: R5.1 U2.12
NetR6_1: R6.1 U2.14
NetR7_1: R7.1 R11.2 U2.7
NetR8_1: R8.1 R10.2 U2.8
NetR9_1: R9.1 R13.2 U2.11
NetR10_1: R10.1
NetR11_1: R11.1
NetR12_1: R12.1 U2.24
NetR13_1: R13.1
NetR14_2: R14.2 U2.10
NetR25_1: R25.1
NetR29_2: R29.2
NetR30_2: R30.2
NetR31_2: R31.2
NetR32_2: R32.2
NetR33_2: R33.2 SW1.1
NetR34_2: R34.2 SW1.2
NetR35_2: R35.2 SW1.3
NetR36_2: R36.2 SW1.4
NetTP1_1: TP1.1 U3.40
NetTP2_1: TP2.1 U3.39
NetTP3_1: TP3.1 U3.38
NetTP4_1: TP4.1 U3.37
NetTP5_1: TP5.1 U3.4
NetTP6_1: TP6.1 U3.5
NetU2_13: U2.13
NetU2_15: U2.15
NetU2_16: U2.16
NetU2_17: U2.17
NetU2_18: U2.18
NetU3_16: U3.16
NetU3_17: U3.17
NetU3_18: U3.18
NetU3_19: U3.19
NetU3_20: U3.20
NetU3_21: U3.21
P3V3: C1.2 C2.2 C3.2 C4.2 C5.2 C6.2 C7.2 C8.2 C9.2 C10.2 C11.2 C12.2 C14.2 C15.2 C16.2 C17.2 C18.2 C19.2 C20.2 C32.1 C34.2 C35.1 C39.2 FB1.1 J2.4 J4.10 J4.11 L1.1 L2.1 R15.2 R16.2 R17.2 R18.2 R19.2 R20.2 R26.2 R27.2 R28.2 SW1.5 SW1.6 SW1.7 SW1.8 U3.13 U3.36 U3.48
P3V3_ETH: C21.2 C22.2 C25.2 C28.1 C29.2 C30.2 C31.2 FB1.2 J1.2 J1.5 R1.2 R2.2 R3.2 R4.2 R5.2 R6.2 R7.2 R8.2 R9.2 U2.1 U2.9 U2.19
RD_N: J1.6 R4.1 U2.22
RD_P: J1.4 R3.1 U2.23
SWDCLK: TP8.1 U3.25
SWDIO: TP7.1 U3.26
TD_N: J1.3 R2.1 U2.20
TD_P: J1.1 R1.1 U2.21
pads on no net: IC1.1 IC1.2 IC1.3 IC1.4 IC1.5 IC1.6 IC1.7 IC1.8 IC1.9 IC1.10 IC1.11 IC1.12 IC1.13 IC1.14 IC1.15 IC1.16 IC1.17 IC1.18 IC1.19 IC1.20 IC1.21 IC1.22 IC1.23 IC1.24 IC1.25 IC1.26 IC1.27 IC1.28 IC1.29 IC1.30 IC1.31 IC1.32 IC1.33 IC1.34 IC1.35 IC1.36 IC1.37 IC1.38 IC1.39 IC1.40 IC1.41 IC1.42 IC1.43 IC1.44 IC1.45 IC1.46 IC1.47 IC1.48 IC1.49 IC1.50 IC1.51 IC1.52 IC1.53 IC1.54 J1.7 J1.8 J1.M1 J1.M2 U3.6 U3.11 U3.12 U3.14 U3.15 U3.22 U3.23 U3.27 U3.28 U3.29 U3.41 U3.42 U3.43 U3.44

## Text inside footprints (layer, text, board x,y; h text height)
J2: Top Overlay "1" at 6460.71,2090.12 h39.37; Top Overlay "8" at 6149.69,2090.12 h39.37; Top Overlay "S" at 6137.88,2365.71 h39.37; Top Overlay "G" at 6295.36,2365.71 h39.37; Top Overlay "S" at 6448.9,2365.71 h39.37; Top Overlay "G" at 6519.77,2365.71 h39.37
J4: Top Overlay "20" at 9015,2140 h40 r90; Mechanical 14 "20" at 9015,2140 h40 r90
SW1: Top Overlay "1" at 6289.21,2964.72 h39.37 r270; Mechanical 14 "1" at 6289.21,2964.72 h39.37 r270